# Altium PCB layout.PcbDoc (part 10 of 11)
Units mil, origin at the board's own origin, x right, y up, seen from the top; angles counter-clockwise.
Board outline 3543.31 x 3149.61 mil, 2 copper layers (Top Layer, Bottom Layer); 78 components, 73 nets, 327 pads, 143 vias.
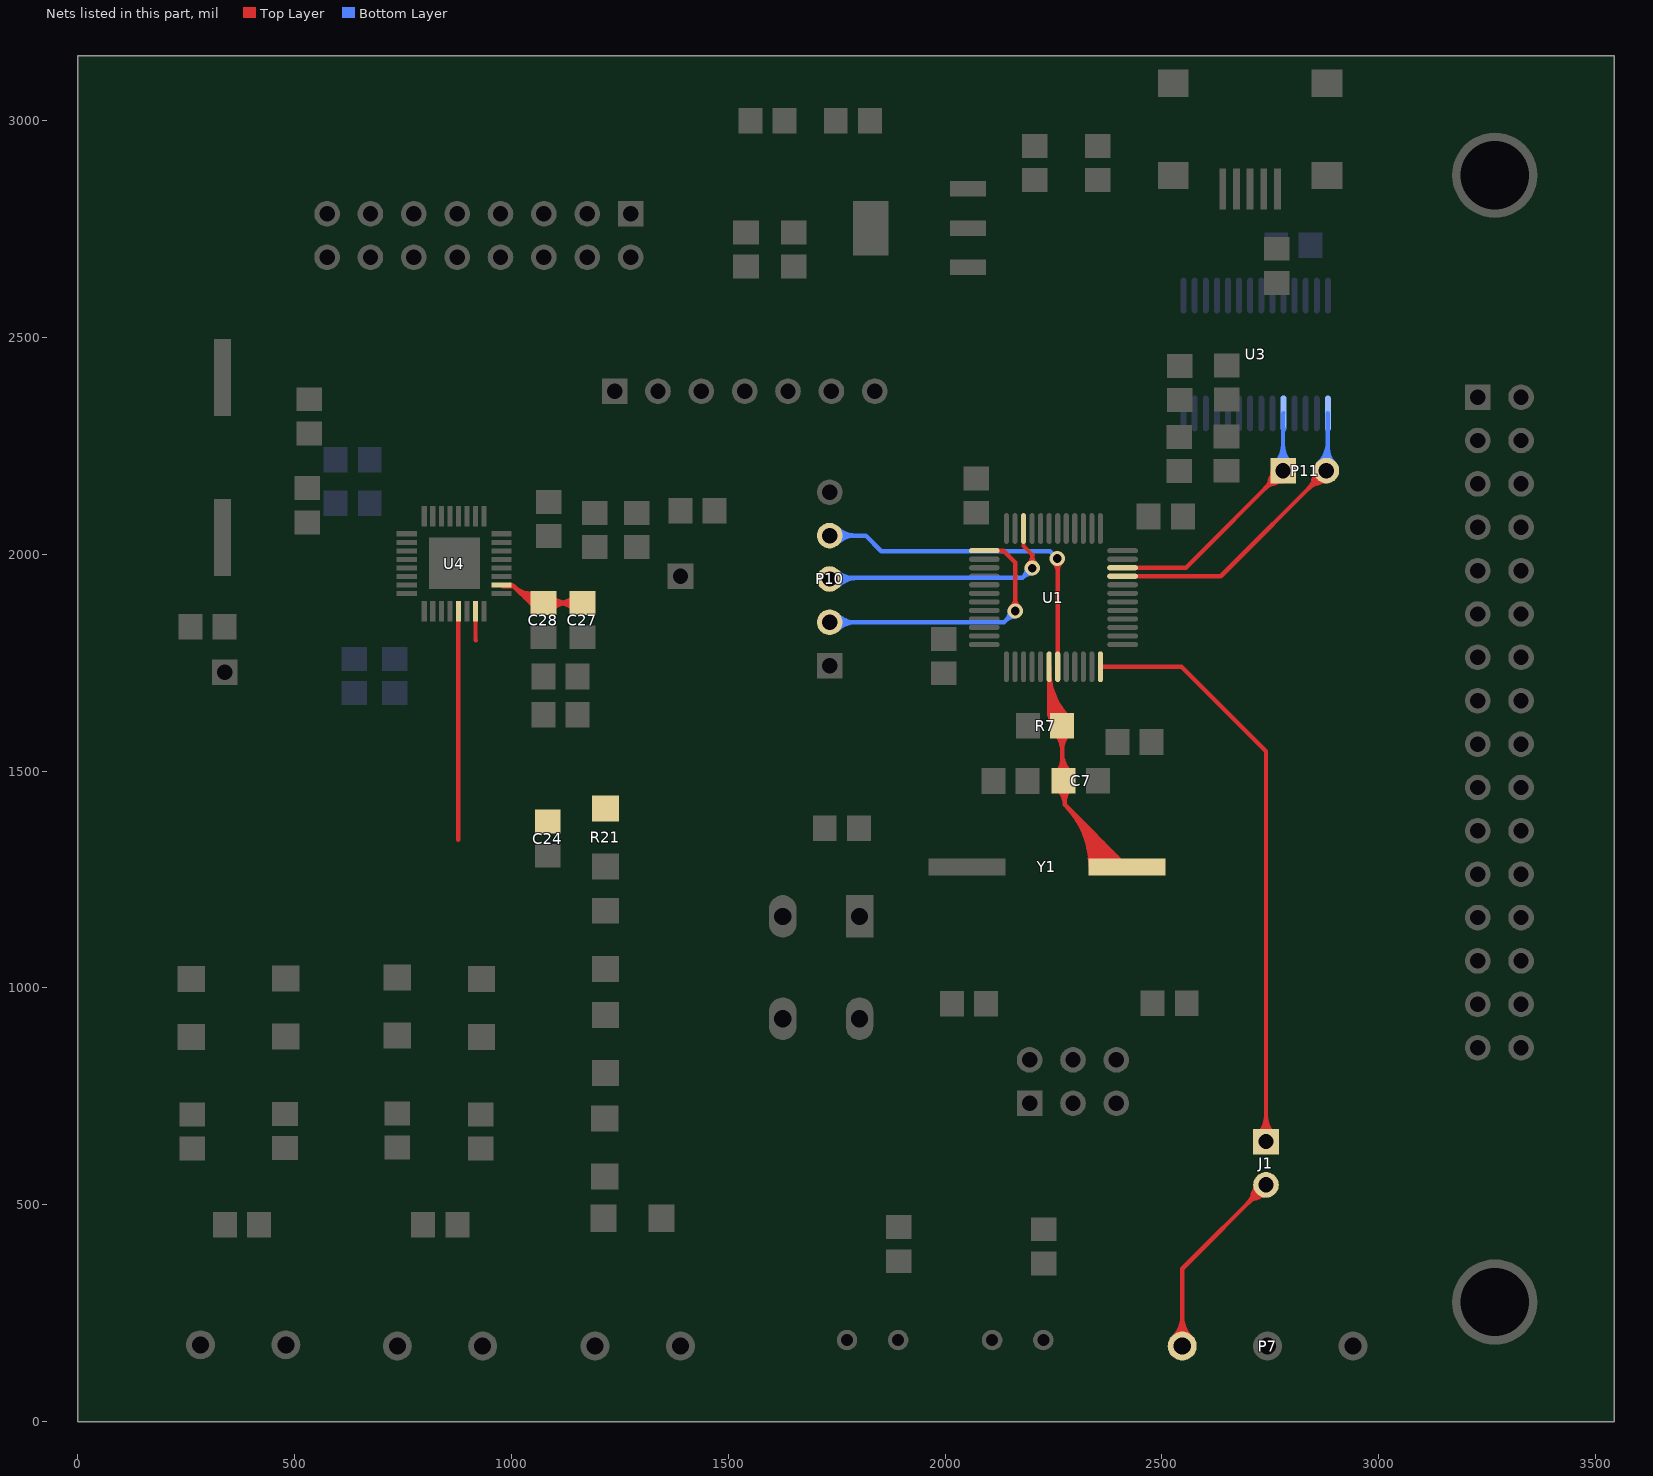
[diagram p10: the nets of this part, all layers, seen from the top]

## Via types
v1: diameter 35, hole 20, Top Layer to Bottom Layer, tented both sides, 113 vias
v2: diameter 35, hole 20, Top Layer to Bottom Layer, 28 vias
v3: diameter 35.43, hole 35.43, Top Layer to Bottom Layer, 2 vias

## Nets (pads, with @x,y where several pads share a name; then routed paths per layer and width w, separated by ;. In a path a pad name is that pad's centre, name@x,y a point inside that pad or via, vN(x,y) a via of type N, cw(c..) or ccw(c..) an arc to the next point about the centre after c; other vN are vias at no path point) (continued)
OSC_OUT: C7.1 R7.1 U1.6 Y1.1 | length 14604.9
  Top Layer w10: U1.6@2240.16,1740.55 2240.16,1634.33 ; Y1.1@2419.65,1279 2276,1422.65 2276,1475.63 C7.1@2273.63,1478 2270.05,1481.58 R7.1@2270.05,1604.44 2240.16,1634.33 ; 2240.16,1634.33 cw(c2220.72,1614.89) R7.1@2247.81,1610.23 ; 2240.16,1634.33 ccw(c2257.34,1651.51) R7.1@2263.93,1628.12 ; 2240.16,1634.33 cw(c2220.72,1614.89) R7.1@2247.81,1610.23 ; 2240.16,1634.33 ccw(c2257.34,1651.51) R7.1@2263.93,1628.12 ; 2240.16,1634.33 cw(c2220.72,1614.89) R7.1@2247.81,1610.23 ; 2240.16,1634.33 ccw(c2257.34,1651.51) R7.1@2263.93,1628.12 ; 2240.16,1634.33 cw(c2220.72,1614.89) R7.1@2247.81,1610.23 ; 2240.16,1634.33 ccw(c2257.34,1651.51) R7.1@2263.93,1628.12 ; 2240.16,1634.33 cw(c2220.72,1614.89) R7.1@2247.81,1610.23 ; 2240.16,1634.33 ccw(c2257.34,1651.51) R7.1@2263.93,1628.12 ; 2240.16,1636.46 ccw(c2300.1,1636.46) R7.1@2257.72,1594.08 ; 2240.16,1636.46 ccw(c2300.1,1636.46) R7.1@2257.72,1594.08 ; 2240.16,1636.46 ccw(c2300.1,1636.46) R7.1@2257.72,1594.08 ; 2240.16,1636.46 ccw(c2300.1,1636.46) R7.1@2257.72,1594.08 ; 2240.16,1636.46 ccw(c2300.1,1636.46) R7.1@2257.72,1594.08 ; 2240.16,1660.61 ccw(c2324.24,1660.61) R7.1@2264.79,1601.15 ; 2240.16,1660.61 ccw(c2324.24,1660.61) R7.1@2264.79,1601.15 ; 2240.16,1660.61 ccw(c2324.24,1660.61) R7.1@2264.79,1601.15 ; 2240.16,1660.61 ccw(c2324.24,1660.61) R7.1@2264.79,1601.15 ; 2240.16,1660.61 ccw(c2324.24,1660.61) R7.1@2264.79,1601.15 ; 2240.16,1684.75 ccw(c2348.39,1684.75) R7.1@2271.86,1608.22 ; 2240.16,1684.75 ccw(c2348.39,1684.75) R7.1@2271.86,1608.22 ; 2240.16,1684.75 ccw(c2348.39,1684.75) R7.1@2271.86,1608.22 ; 2240.16,1684.75 ccw(c2348.39,1684.75) R7.1@2271.86,1608.22 ; 2240.16,1684.75 ccw(c2348.39,1684.75) R7.1@2271.86,1608.22 ; U1.6@2240.16,1708.89 ccw(c2372.53,1708.89) R7.1@2278.93,1615.29 ; U1.6@2240.16,1708.89 ccw(c2372.53,1708.89) R7.1@2278.93,1615.29 ; U1.6@2240.16,1708.89 ccw(c2372.53,1708.89) R7.1@2278.93,1615.29 ; U1.6@2240.16,1708.89 ccw(c2372.53,1708.89) R7.1@2278.93,1615.29 ; U1.6@2240.16,1708.89 ccw(c2372.53,1708.89) R7.1@2278.93,1615.29 ; U1.6@2240.16,1733.03 ccw(c2396.67,1733.03) R7.1@2286,1622.36 ; U1.6@2240.16,1733.03 ccw(c2396.67,1733.03) R7.1@2286,1622.36 ; U1.6@2240.16,1733.03 ccw(c2396.67,1733.03) R7.1@2286,1622.36 ; U1.6@2240.16,1733.03 ccw(c2396.67,1733.03) R7.1@2286,1622.36 ; U1.6@2240.16,1733.03 ccw(c2396.67,1733.03) R7.1@2286,1622.36 ; 2240.95,1642.43 ccw(c2264.76,1656.18) R7.1@2267.66,1628.84 ; 2240.95,1642.43 ccw(c2264.76,1656.18) R7.1@2267.66,1628.84 ; 2240.95,1642.43 ccw(c2264.76,1656.18) R7.1@2267.66,1628.84 ; 2240.95,1642.43 ccw(c2264.76,1656.18) R7.1@2267.66,1628.84 ; 2240.95,1642.43 ccw(c2264.76,1656.18) R7.1@2267.66,1628.84 ; 2240.95,1642.43 ccw(c2264.76,1656.18) R7.1@2267.66,1628.84 ; 2240.95,1642.43 ccw(c2264.76,1656.18) R7.1@2267.66,1628.84 ; 2240.95,1642.43 ccw(c2264.76,1656.18) R7.1@2267.66,1628.84 ; 2240.95,1642.43 ccw(c2264.76,1656.18) R7.1@2267.66,1628.84 ; 2240.95,1642.43 ccw(c2264.76,1656.18) R7.1@2267.66,1628.84 ; 2244.56,1655.5 cw(c2200.44,1630.02) R7.1@2248.69,1613.66 ; 2244.56,1655.5 cw(c2200.44,1630.02) R7.1@2248.69,1613.66 ; 2244.56,1655.5 cw(c2200.44,1630.02) R7.1@2248.69,1613.66 ; 2244.56,1655.5 cw(c2200.44,1630.02) R7.1@2248.69,1613.66 ; 2244.56,1655.5 cw(c2200.44,1630.02) R7.1@2248.69,1613.66 ; 2244.56,1655.5 cw(c2200.44,1630.02) R7.1@2248.69,1613.66 ; 2244.56,1655.5 cw(c2200.44,1630.02) R7.1@2248.69,1613.66 ; 2244.56,1655.5 cw(c2200.44,1630.02) R7.1@2248.69,1613.66 ; 2244.56,1655.5 cw(c2200.44,1630.02) R7.1@2248.69,1613.66 ; 2244.56,1655.5 cw(c2200.44,1630.02) R7.1@2248.69,1613.66 ; 2245.27,1634.95 cw(c2219.35,1619.99) R7.1@2248.26,1612.25 ; 2245.27,1634.95 cw(c2219.35,1619.99) R7.1@2248.26,1612.25 ; 2245.27,1634.95 cw(c2219.35,1619.99) R7.1@2248.26,1612.25 ; 2245.27,1634.95 cw(c2219.35,1619.99) R7.1@2248.26,1612.25 ; 2245.27,1634.95 cw(c2219.35,1619.99) R7.1@2248.26,1612.25 ; 2245.27,1634.95 cw(c2219.35,1619.99) R7.1@2248.26,1612.25 ; 2245.27,1634.95 cw(c2219.35,1619.99) R7.1@2248.26,1612.25 ; 2245.27,1634.95 cw(c2219.35,1619.99) R7.1@2248.26,1612.25 ; 2245.27,1634.95 cw(c2219.35,1619.99) R7.1@2248.26,1612.25 ; 2245.27,1634.95 cw(c2219.35,1619.99) R7.1@2248.26,1612.25 ; 2247.94,1649.64 ccw(c2287.8,1672.65) R7.1@2275.89,1628.2 ; 2247.94,1649.64 ccw(c2287.8,1672.65) R7.1@2275.89,1628.2 ; 2247.94,1649.64 ccw(c2287.8,1672.65) R7.1@2275.89,1628.2 ; 2247.94,1649.64 ccw(c2287.8,1672.65) R7.1@2275.89,1628.2 ; 2247.94,1649.64 ccw(c2287.8,1672.65) R7.1@2275.89,1628.2 ; 2247.94,1649.64 ccw(c2287.8,1672.65) R7.1@2275.89,1628.2 ; 2247.94,1649.64 ccw(c2287.8,1672.65) R7.1@2275.89,1628.2 ; 2247.94,1649.64 ccw(c2287.8,1672.65) R7.1@2275.89,1628.2 ; 2247.94,1649.64 ccw(c2287.8,1672.65) R7.1@2275.89,1628.2 ; 2247.94,1649.64 ccw(c2287.8,1672.65) R7.1@2275.89,1628.2 ; R7.1@2248.64,1629.12 ccw(c2266.54,1639.45) R7.1@2268.72,1618.9 ; R7.1@2248.64,1629.12 ccw(c2266.54,1639.45) R7.1@2268.72,1618.9 ; R7.1@2248.64,1629.12 ccw(c2266.54,1639.45) R7.1@2268.72,1618.9 ; R7.1@2248.64,1629.12 ccw(c2266.54,1639.45) R7.1@2268.72,1618.9 ; R7.1@2248.64,1629.12 ccw(c2266.54,1639.45) R7.1@2268.72,1618.9 ; R7.1@2248.64,1629.12 ccw(c2266.54,1639.45) R7.1@2268.72,1618.9 ; R7.1@2248.64,1629.12 ccw(c2266.54,1639.45) R7.1@2268.72,1618.9 ; R7.1@2248.64,1629.12 ccw(c2266.54,1639.45) R7.1@2268.72,1618.9 ; R7.1@2248.64,1629.12 ccw(c2266.54,1639.45) R7.1@2268.72,1618.9 ; R7.1@2248.64,1629.12 ccw(c2266.54,1639.45) R7.1@2268.72,1618.9 ; 2250.56,1642.4 ccw(c2306.88,1638.72) R7.1@2264.45,1601.5 ; 2250.56,1642.4 ccw(c2306.88,1638.72) R7.1@2264.45,1601.5 ; 2250.56,1642.4 ccw(c2306.88,1638.72) R7.1@2264.45,1601.5 ; 2250.56,1642.4 ccw(c2306.88,1638.72) R7.1@2264.45,1601.5 ; 2250.56,1642.4 ccw(c2306.88,1638.72) R7.1@2264.45,1601.5 ; 2250.56,1642.4 ccw(c2306.88,1638.72) R7.1@2264.45,1601.5 ; 2250.56,1642.4 ccw(c2306.88,1638.72) R7.1@2264.45,1601.5 ; 2250.56,1642.4 ccw(c2306.88,1638.72) R7.1@2264.45,1601.5 ; 2250.56,1642.4 ccw(c2306.88,1638.72) R7.1@2264.45,1601.5 ; 2250.56,1642.4 ccw(c2306.88,1638.72) R7.1@2264.45,1601.5 ; R7.1@2251.58,1619.36 ccw(c2224.65,1638.23) 2252.18,1656.22 ; R7.1@2251.58,1619.36 ccw(c2224.65,1638.23) 2252.18,1656.22 ; R7.1@2251.58,1619.36 ccw(c2224.65,1638.23) 2252.18,1656.22 ; R7.1@2251.58,1619.36 ccw(c2224.65,1638.23) 2252.18,1656.22 ; R7.1@2251.58,1619.36 ccw(c2224.65,1638.23) 2252.18,1656.22 ; R7.1@2251.58,1619.36 ccw(c2224.65,1638.23) 2252.18,1656.22 ; R7.1@2251.58,1619.36 ccw(c2224.65,1638.23) 2252.18,1656.22 ; R7.1@2251.58,1619.36 ccw(c2224.65,1638.23) 2252.18,1656.22 ; R7.1@2251.58,1619.36 ccw(c2224.65,1638.23) 2252.18,1656.22 ; R7.1@2251.58,1619.36 ccw(c2224.65,1638.23) 2252.18,1656.22 ; R7.1@2254.1,1586.52 cw(c2215.59,1548.01) 2270.05,1548.01 ; R7.1@2254.1,1586.52 cw(c2215.59,1548.01) 2270.05,1548.01 ; R7.1@2254.1,1586.52 cw(c2215.59,1548.01) 2270.05,1548.01 ; R7.1@2254.1,1586.52 cw(c2215.59,1548.01) 2270.05,1548.01 ; R7.1@2254.1,1586.52 cw(c2215.59,1548.01) 2270.05,1548.01 ; 2255.6,1636.38 cw(c2228.25,1620.59) R7.1@2258.15,1610.44 ; 2255.6,1636.38 cw(c2228.25,1620.59) R7.1@2258.15,1610.44 ; 2255.6,1636.38 cw(c2228.25,1620.59) R7.1@2258.15,1610.44 ; 2255.6,1636.38 cw(c2228.25,1620.59) R7.1@2258.15,1610.44 ; 2255.6,1636.38 cw(c2228.25,1620.59) R7.1@2258.15,1610.44 ; 2255.6,1636.38 cw(c2228.25,1620.59) R7.1@2258.15,1610.44 ; 2255.6,1636.38 cw(c2228.25,1620.59) R7.1@2258.15,1610.44 ; 2255.6,1636.38 cw(c2228.25,1620.59) R7.1@2258.15,1610.44 ; 2255.6,1636.38 cw(c2228.25,1620.59) R7.1@2258.15,1610.44 ; 2255.6,1636.38 cw(c2228.25,1620.59) R7.1@2258.15,1610.44 ; C7.1@2257.68,1495.92 ccw(c2227.81,1525.78) 2270.05,1525.78 ; C7.1@2257.68,1495.92 ccw(c2227.81,1525.78) 2270.05,1525.78 ; C7.1@2257.68,1495.92 ccw(c2227.81,1525.78) 2270.05,1525.78 ; C7.1@2257.68,1495.92 ccw(c2227.81,1525.78) 2270.05,1525.78 ; C7.1@2257.68,1495.92 ccw(c2227.81,1525.78) 2270.05,1525.78 ; C7.1@2259.14,1458.75 cw(c2228.83,1422.6) 2276,1422.6 ; C7.1@2259.14,1458.75 cw(c2228.83,1422.6) 2276,1422.6 ; C7.1@2259.14,1458.75 cw(c2228.83,1422.6) 2276,1422.6 ; C7.1@2259.14,1458.75 cw(c2228.83,1422.6) 2276,1422.6 ; C7.1@2259.14,1458.75 cw(c2228.83,1422.6) 2276,1422.6 ; R7.1@2259.76,1613.62 ccw(c2237.68,1629.1) 2260.26,1643.86 ; R7.1@2259.76,1613.62 ccw(c2237.68,1629.1) 2260.26,1643.86 ; R7.1@2259.76,1613.62 ccw(c2237.68,1629.1) 2260.26,1643.86 ; R7.1@2259.76,1613.62 ccw(c2237.68,1629.1) 2260.26,1643.86 ; R7.1@2259.76,1613.62 ccw(c2237.68,1629.1) 2260.26,1643.86 ; R7.1@2259.76,1613.62 ccw(c2237.68,1629.1) 2260.26,1643.86 ; R7.1@2259.76,1613.62 ccw(c2237.68,1629.1) 2260.26,1643.86 ; R7.1@2259.76,1613.62 ccw(c2237.68,1629.1) 2260.26,1643.86 ; R7.1@2259.76,1613.62 ccw(c2237.68,1629.1) 2260.26,1643.86 ; R7.1@2259.76,1613.62 ccw(c2237.68,1629.1) 2260.26,1643.86 ; R7.1@2261.17,1593.59 cw(c2239.73,1572.15) 2270.05,1572.15 ; R7.1@2261.17,1593.59 cw(c2239.73,1572.15) 2270.05,1572.15 ; R7.1@2261.17,1593.59 cw(c2239.73,1572.15) 2270.05,1572.15 ; R7.1@2261.17,1593.59 cw(c2239.73,1572.15) 2270.05,1572.15 ; R7.1@2261.17,1593.59 cw(c2239.73,1572.15) 2270.05,1572.15 ; C7.1@2265.56,1466.41 cw(c2246.8,1444.03) 2276,1444.03 ; C7.1@2265.56,1466.41 cw(c2246.8,1444.03) 2276,1444.03 ; C7.1@2265.56,1466.41 cw(c2246.8,1444.03) 2276,1444.03 ; C7.1@2265.56,1466.41 cw(c2246.8,1444.03) 2276,1444.03 ; C7.1@2265.56,1466.41 cw(c2246.8,1444.03) 2276,1444.03 ; R7.1@2266.78,1633.88 ccw(c2277.24,1640.72) R7.1@2274.67,1628.49 ; R7.1@2266.78,1633.88 ccw(c2277.24,1640.72) R7.1@2274.67,1628.49 ; R7.1@2266.78,1633.88 ccw(c2277.24,1640.72) R7.1@2274.67,1628.49 ; R7.1@2266.78,1633.88 ccw(c2277.24,1640.72) R7.1@2274.67,1628.49 ; R7.1@2266.78,1633.88 ccw(c2277.24,1640.72) R7.1@2274.67,1628.49 ; R7.1@2266.78,1633.88 ccw(c2277.24,1640.72) R7.1@2274.67,1628.49 ; R7.1@2266.78,1633.88 ccw(c2277.24,1640.72) R7.1@2274.67,1628.49 ; R7.1@2266.78,1633.88 ccw(c2277.24,1640.72) R7.1@2274.67,1628.49 ; R7.1@2266.78,1633.88 ccw(c2277.24,1640.72) R7.1@2274.67,1628.49 ; R7.1@2266.78,1633.88 ccw(c2277.24,1640.72) R7.1@2274.67,1628.49 ; 2270.05,1518.94 ccw(c2312.6,1518.94) C7.1@2282.51,1488.85 ; 2270.05,1518.94 ccw(c2312.6,1518.94) C7.1@2282.51,1488.85 ; 2270.05,1518.94 ccw(c2312.6,1518.94) C7.1@2282.51,1488.85 ; 2270.05,1518.94 ccw(c2312.6,1518.94) C7.1@2282.51,1488.85 ; 2270.05,1518.94 ccw(c2312.6,1518.94) C7.1@2282.51,1488.85 ; 2270.05,1543.08 ccw(c2336.74,1543.08) C7.1@2289.58,1495.92 ; 2270.05,1543.08 ccw(c2336.74,1543.08) C7.1@2289.58,1495.92 ; 2270.05,1543.08 ccw(c2336.74,1543.08) C7.1@2289.58,1495.92 ; 2270.05,1543.08 ccw(c2336.74,1543.08) C7.1@2289.58,1495.92 ; 2270.05,1543.08 ccw(c2336.74,1543.08) C7.1@2289.58,1495.92 ; 2270.05,1548.01 cw(c2324.51,1548.01) R7.1@2286,1586.52 ; 2270.05,1548.01 cw(c2324.51,1548.01) R7.1@2286,1586.52 ; 2270.05,1548.01 cw(c2324.51,1548.01) R7.1@2286,1586.52 ; 2270.05,1548.01 cw(c2324.51,1548.01) R7.1@2286,1586.52 ; 2270.05,1548.01 cw(c2324.51,1548.01) R7.1@2286,1586.52 ; 2270.05,1572.15 cw(c2300.37,1572.15) R7.1@2278.93,1593.59 ; 2270.05,1572.15 cw(c2300.37,1572.15) R7.1@2278.93,1593.59 ; 2270.05,1572.15 cw(c2300.37,1572.15) R7.1@2278.93,1593.59 ; 2270.05,1572.15 cw(c2300.37,1572.15) R7.1@2278.93,1593.59 ; 2270.05,1572.15 cw(c2300.37,1572.15) R7.1@2278.93,1593.59 ; 2276,1427.29 cw(c2322.37,1427.29) C7.1@2289.58,1460.08 ; 2276,1427.29 cw(c2322.37,1427.29) C7.1@2289.58,1460.08 ; 2276,1427.29 cw(c2322.37,1427.29) C7.1@2289.58,1460.08 ; 2276,1427.29 cw(c2322.37,1427.29) C7.1@2289.58,1460.08 ; 2276,1427.29 cw(c2322.37,1427.29) C7.1@2289.58,1460.08 ; 2276.96,1421.69 cw(c2134.28,1279) Y1.1@2336.06,1279 ; 2276.96,1421.69 cw(c2134.28,1279) Y1.1@2336.06,1279 ; 2276.96,1421.69 cw(c2134.28,1279) Y1.1@2336.06,1279 ; 2276.96,1421.69 cw(c2134.28,1279) Y1.1@2336.06,1279 ; 2276.96,1421.69 cw(c2134.28,1279) Y1.1@2336.06,1279 ; 2294.03,1404.61 cw(c2168.42,1279) Y1.1@2346.06,1279 ; 2294.03,1404.61 cw(c2168.42,1279) Y1.1@2346.06,1279 ; 2294.03,1404.61 cw(c2168.42,1279) Y1.1@2346.06,1279 ; 2294.03,1404.61 cw(c2168.42,1279) Y1.1@2346.06,1279 ; 2294.03,1404.61 cw(c2168.42,1279) Y1.1@2346.06,1279 ; 2311.1,1387.54 cw(c2202.56,1279) Y1.1@2356.06,1279 ; 2311.1,1387.54 cw(c2202.56,1279) Y1.1@2356.06,1279 ; 2311.1,1387.54 cw(c2202.56,1279) Y1.1@2356.06,1279 ; 2311.1,1387.54 cw(c2202.56,1279) Y1.1@2356.06,1279 ; 2311.1,1387.54 cw(c2202.56,1279) Y1.1@2356.06,1279 ; 2328.17,1370.47 cw(c2236.7,1279) Y1.1@2366.06,1279 ; 2328.17,1370.47 cw(c2236.7,1279) Y1.1@2366.06,1279 ; 2328.17,1370.47 cw(c2236.7,1279) Y1.1@2366.06,1279 ; 2328.17,1370.47 cw(c2236.7,1279) Y1.1@2366.06,1279 ; 2328.17,1370.47 cw(c2236.7,1279) Y1.1@2366.06,1279 ; 2330.56,1323.35 ccw(c2391.16,1330.87) Y1.1@2353.63,1282.7 ; 2330.56,1323.35 ccw(c2391.16,1330.87) Y1.1@2353.63,1282.7 ; 2330.56,1323.35 ccw(c2391.16,1330.87) Y1.1@2353.63,1282.7 ; 2330.56,1323.35 ccw(c2391.16,1330.87) Y1.1@2353.63,1282.7 ; 2330.56,1323.35 ccw(c2391.16,1330.87) Y1.1@2353.63,1282.7 ; 2330.56,1323.35 ccw(c2391.16,1330.87) Y1.1@2353.63,1282.7 ; 2330.56,1323.35 ccw(c2391.16,1330.87) Y1.1@2353.63,1282.7 ; 2330.56,1323.35 ccw(c2391.16,1330.87) Y1.1@2353.63,1282.7 ; 2330.56,1323.35 ccw(c2391.16,1330.87) Y1.1@2353.63,1282.7 ; 2330.56,1323.35 ccw(c2391.16,1330.87) Y1.1@2353.63,1282.7 ; 2333.53,1299.39 ccw(c2370.18,1303.93) Y1.1@2347.48,1274.81 ; 2333.53,1299.39 ccw(c2370.18,1303.93) Y1.1@2347.48,1274.81 ; 2333.53,1299.39 ccw(c2370.18,1303.93) Y1.1@2347.48,1274.81 ; 2333.53,1299.39 ccw(c2370.18,1303.93) Y1.1@2347.48,1274.81 ; 2333.53,1299.39 ccw(c2370.18,1303.93) Y1.1@2347.48,1274.81 ; 2333.53,1299.39 ccw(c2370.18,1303.93) Y1.1@2347.48,1274.81 ; 2333.53,1299.39 ccw(c2370.18,1303.93) Y1.1@2347.48,1274.81 ; 2333.53,1299.39 ccw(c2370.18,1303.93) Y1.1@2347.48,1274.81 ; 2333.53,1299.39 ccw(c2370.18,1303.93) Y1.1@2347.48,1274.81 ; 2333.53,1299.39 ccw(c2370.18,1303.93) Y1.1@2347.48,1274.81 ; 2335.35,1306.89 cw(c2318.75,1294.35) Y1.1@2337.51,1285.35 ; 2335.35,1306.89 cw(c2318.75,1294.35) Y1.1@2337.51,1285.35 ; 2335.35,1306.89 cw(c2318.75,1294.35) Y1.1@2337.51,1285.35 ; 2335.35,1306.89 cw(c2318.75,1294.35) Y1.1@2337.51,1285.35 ; 2335.35,1306.89 cw(c2318.75,1294.35) Y1.1@2337.51,1285.35 ; 2335.35,1306.89 cw(c2318.75,1294.35) Y1.1@2337.51,1285.35 ; 2335.35,1306.89 cw(c2318.75,1294.35) Y1.1@2337.51,1285.35 ; 2335.35,1306.89 cw(c2318.75,1294.35) Y1.1@2337.51,1285.35 ; 2335.35,1306.89 cw(c2318.75,1294.35) Y1.1@2337.51,1285.35 ; 2335.35,1306.89 cw(c2318.75,1294.35) Y1.1@2337.51,1285.35 ; Y1.1@2339.01,1287.83 ccw(c2323.34,1299.62) 2342.76,1302.37 ; Y1.1@2339.01,1287.83 ccw(c2323.34,1299.62) 2342.76,1302.37 ; Y1.1@2339.01,1287.83 ccw(c2323.34,1299.62) 2342.76,1302.37 ; Y1.1@2339.01,1287.83 ccw(c2323.34,1299.62) 2342.76,1302.37 ; Y1.1@2339.01,1287.83 ccw(c2323.34,1299.62) 2342.76,1302.37 ; Y1.1@2339.01,1287.83 ccw(c2323.34,1299.62) 2342.76,1302.37 ; Y1.1@2339.01,1287.83 ccw(c2323.34,1299.62) 2342.76,1302.37 ; Y1.1@2339.01,1287.83 ccw(c2323.34,1299.62) 2342.76,1302.37 ; Y1.1@2339.01,1287.83 ccw(c2323.34,1299.62) 2342.76,1302.37 ; Y1.1@2339.01,1287.83 ccw(c2323.34,1299.62) 2342.76,1302.37 ; 2339.57,1301.3 ccw(c2355.53,1313.36) Y1.1@2352.77,1293.55 ; 2339.57,1301.3 ccw(c2355.53,1313.36) Y1.1@2352.77,1293.55 ; 2339.57,1301.3 ccw(c2355.53,1313.36) Y1.1@2352.77,1293.55 ; 2339.57,1301.3 ccw(c2355.53,1313.36) Y1.1@2352.77,1293.55 ; 2339.57,1301.3 ccw(c2355.53,1313.36) Y1.1@2352.77,1293.55 ; 2339.57,1301.3 ccw(c2355.53,1313.36) Y1.1@2352.77,1293.55 ; 2339.57,1301.3 ccw(c2355.53,1313.36) Y1.1@2352.77,1293.55 ; 2339.57,1301.3 ccw(c2355.53,1313.36) Y1.1@2352.77,1293.55 ; 2339.57,1301.3 ccw(c2355.53,1313.36) Y1.1@2352.77,1293.55 ; 2339.57,1301.3 ccw(c2355.53,1313.36) Y1.1@2352.77,1293.55 ; 2339.63,1324.54 ccw(c2390.41,1331.72) Y1.1@2359.58,1290.74 ; 2339.63,1324.54 ccw(c2390.41,1331.72) Y1.1@2359.58,1290.74 ; 2339.63,1324.54 ccw(c2390.41,1331.72) Y1.1@2359.58,1290.74 ; 2339.63,1324.54 ccw(c2390.41,1331.72) Y1.1@2359.58,1290.74 ; 2339.63,1324.54 ccw(c2390.41,1331.72) Y1.1@2359.58,1290.74 ; 2339.63,1324.54 ccw(c2390.41,1331.72) Y1.1@2359.58,1290.74 ; 2339.63,1324.54 ccw(c2390.41,1331.72) Y1.1@2359.58,1290.74 ; 2339.63,1324.54 ccw(c2390.41,1331.72) Y1.1@2359.58,1290.74 ; 2339.63,1324.54 ccw(c2390.41,1331.72) Y1.1@2359.58,1290.74 ; 2339.63,1324.54 ccw(c2390.41,1331.72) Y1.1@2359.58,1290.74 ; Y1.1@2341.8,1290.64 ccw(c2327.7,1308.98) 2350.53,1312.73 ; Y1.1@2341.8,1290.64 ccw(c2327.7,1308.98) 2350.53,1312.73 ; Y1.1@2341.8,1290.64 ccw(c2327.7,1308.98) 2350.53,1312.73 ; Y1.1@2341.8,1290.64 ccw(c2327.7,1308.98) 2350.53,1312.73 ; Y1.1@2341.8,1290.64 ccw(c2327.7,1308.98) 2350.53,1312.73 ; Y1.1@2341.8,1290.64 ccw(c2327.7,1308.98) 2350.53,1312.73 ; Y1.1@2341.8,1290.64 ccw(c2327.7,1308.98) 2350.53,1312.73 ; Y1.1@2341.8,1290.64 ccw(c2327.7,1308.98) 2350.53,1312.73 ; Y1.1@2341.8,1290.64 ccw(c2327.7,1308.98) 2350.53,1312.73 ; Y1.1@2341.8,1290.64 ccw(c2327.7,1308.98) 2350.53,1312.73 ; 2343.01,1300.64 ccw(c2369.89,1304.44) Y1.1@2353.56,1282.74 ; 2343.01,1300.64 ccw(c2369.89,1304.44) Y1.1@2353.56,1282.74 ; 2343.01,1300.64 ccw(c2369.89,1304.44) Y1.1@2353.56,1282.74 ; 2343.01,1300.64 ccw(c2369.89,1304.44) Y1.1@2353.56,1282.74 ; 2343.01,1300.64 ccw(c2369.89,1304.44) Y1.1@2353.56,1282.74 ; 2343.01,1300.64 ccw(c2369.89,1304.44) Y1.1@2353.56,1282.74 ; 2343.01,1300.64 ccw(c2369.89,1304.44) Y1.1@2353.56,1282.74 ; 2343.01,1300.64 ccw(c2369.89,1304.44) Y1.1@2353.56,1282.74 ; 2343.01,1300.64 ccw(c2369.89,1304.44) Y1.1@2353.56,1282.74 ; 2343.01,1300.64 ccw(c2369.89,1304.44) Y1.1@2353.56,1282.74 ; 2345.25,1353.4 cw(c2270.85,1279) Y1.1@2376.06,1279 ; 2345.25,1353.4 cw(c2270.85,1279) Y1.1@2376.06,1279 ; 2345.25,1353.4 cw(c2270.85,1279) Y1.1@2376.06,1279 ; 2345.25,1353.4 cw(c2270.85,1279) Y1.1@2376.06,1279 ; 2345.25,1353.4 cw(c2270.85,1279) Y1.1@2376.06,1279 ; 2352.23,1302.34 ccw(c2369.55,1305.18) Y1.1@2359.31,1290.93 ; 2352.23,1302.34 ccw(c2369.55,1305.18) Y1.1@2359.31,1290.93 ; 2352.23,1302.34 ccw(c2369.55,1305.18) Y1.1@2359.31,1290.93 ; 2352.23,1302.34 ccw(c2369.55,1305.18) Y1.1@2359.31,1290.93 ; 2352.23,1302.34 ccw(c2369.55,1305.18) Y1.1@2359.31,1290.93 ; 2352.23,1302.34 ccw(c2369.55,1305.18) Y1.1@2359.31,1290.93 ; 2352.23,1302.34 ccw(c2369.55,1305.18) Y1.1@2359.31,1290.93 ; 2352.23,1302.34 ccw(c2369.55,1305.18) Y1.1@2359.31,1290.93 ; 2352.23,1302.34 ccw(c2369.55,1305.18) Y1.1@2359.31,1290.93 ; 2352.23,1302.34 ccw(c2369.55,1305.18) Y1.1@2359.31,1290.93 ; 2362.32,1336.33 cw(c2304.99,1279) Y1.1@2386.06,1279 ; 2362.32,1336.33 cw(c2304.99,1279) Y1.1@2386.06,1279 ; 2362.32,1336.33 cw(c2304.99,1279) Y1.1@2386.06,1279 ; 2362.32,1336.33 cw(c2304.99,1279) Y1.1@2386.06,1279 ; 2362.32,1336.33 cw(c2304.99,1279) Y1.1@2386.06,1279 ; 2379.39,1319.26 cw(c2339.13,1279) Y1.1@2396.06,1279 ; 2379.39,1319.26 cw(c2339.13,1279) Y1.1@2396.06,1279 ; 2379.39,1319.26 cw(c2339.13,1279) Y1.1@2396.06,1279 ; 2379.39,1319.26 cw(c2339.13,1279) Y1.1@2396.06,1279 ; 2379.39,1319.26 cw(c2339.13,1279) Y1.1@2396.06,1279 ; 2388.59,1306.89 ccw(c2435.98,1319.59) Y1.1@2417.66,1274.07 ; 2388.59,1306.89 ccw(c2435.98,1319.59) Y1.1@2417.66,1274.07 ; 2388.59,1306.89 ccw(c2435.98,1319.59) Y1.1@2417.66,1274.07 ; 2388.59,1306.89 ccw(c2435.98,1319.59) Y1.1@2417.66,1274.07 ; 2388.59,1306.89 ccw(c2435.98,1319.59) Y1.1@2417.66,1274.07 ; 2388.59,1306.89 ccw(c2435.98,1319.59) Y1.1@2417.66,1274.07 ; 2388.59,1306.89 ccw(c2435.98,1319.59) Y1.1@2417.66,1274.07 ; 2388.59,1306.89 ccw(c2435.98,1319.59) Y1.1@2417.66,1274.07 ; 2388.59,1306.89 ccw(c2435.98,1319.59) Y1.1@2417.66,1274.07 ; 2388.59,1306.89 ccw(c2435.98,1319.59) Y1.1@2417.66,1274.07 ; Y1.1@2393.77,1287.54 ccw(c2426.63,1296.35) Y1.1@2413.93,1264.79 ; Y1.1@2393.77,1287.54 ccw(c2426.63,1296.35) Y1.1@2413.93,1264.79 ; Y1.1@2393.77,1287.54 ccw(c2426.63,1296.35) Y1.1@2413.93,1264.79 ; Y1.1@2393.77,1287.54 ccw(c2426.63,1296.35) Y1.1@2413.93,1264.79 ; Y1.1@2393.77,1287.54 ccw(c2426.63,1296.35) Y1.1@2413.93,1264.79 ; Y1.1@2393.77,1287.54 ccw(c2426.63,1296.35) Y1.1@2413.93,1264.79 ; Y1.1@2393.77,1287.54 ccw(c2426.63,1296.35) Y1.1@2413.93,1264.79 ; Y1.1@2393.77,1287.54 ccw(c2426.63,1296.35) Y1.1@2413.93,1264.79 ; Y1.1@2393.77,1287.54 ccw(c2426.63,1296.35) Y1.1@2413.93,1264.79 ; Y1.1@2393.77,1287.54 ccw(c2426.63,1296.35) Y1.1@2413.93,1264.79 ; 2396.46,1302.19 cw(c2373.27,1279) Y1.1@2406.06,1279 ; 2396.46,1302.19 cw(c2373.27,1279) Y1.1@2406.06,1279 ; 2396.46,1302.19 cw(c2373.27,1279) Y1.1@2406.06,1279 ; 2396.46,1302.19 cw(c2373.27,1279) Y1.1@2406.06,1279 ; 2396.46,1302.19 cw(c2373.27,1279) Y1.1@2406.06,1279 ; Y1.1@2413.53,1285.12 cw(c2407.41,1279) Y1.1@2416.06,1279 ; Y1.1@2413.53,1285.12 cw(c2407.41,1279) Y1.1@2416.06,1279 ; Y1.1@2413.53,1285.12 cw(c2407.41,1279) Y1.1@2416.06,1279 ; Y1.1@2413.53,1285.12 cw(c2407.41,1279) Y1.1@2416.06,1279 ; Y1.1@2413.53,1285.12 cw(c2407.41,1279) Y1.1@2416.06,1279
REFIN: C27.1 C28.1 U4.18 | length 3632.3
  Top Layer w10: U4.18@977.23,1929.1 980.01,1926.32 1005.41,1926.32 ; C27.1@1164,1887.37 C28.1@1074,1887.37 1044.36,1887.37 ; U4.18@995.3,1928.27 cw(c998.92,1919.83) 1005.41,1926.32 ; U4.18@995.3,1928.27 cw(c998.92,1919.83) 1005.41,1926.32 ; U4.18@995.3,1928.27 cw(c998.92,1919.83) 1005.41,1926.32 ; U4.18@995.3,1928.27 cw(c998.92,1919.83) 1005.41,1926.32 ; U4.18@995.3,1928.27 cw(c998.92,1919.83) 1005.41,1926.32 ; U4.18@995.58,1929.74 ccw(c1003.84,1938) 1003.84,1926.32 ; U4.18@995.58,1929.74 ccw(c1003.84,1938) 1003.84,1926.32 ; U4.18@995.58,1929.74 ccw(c1003.84,1938) 1003.84,1926.32 ; U4.18@995.58,1929.74 ccw(c1003.84,1938) 1003.84,1926.32 ; U4.18@995.58,1929.74 ccw(c1003.84,1938) 1003.84,1926.32 ; 1005.41,1926.32 ccw(c1051.12,1972.04) C28.1@1066.62,1909.27 ; 1005.41,1926.32 ccw(c1051.12,1972.04) C28.1@1066.62,1909.27 ; 1005.41,1926.32 ccw(c1051.12,1972.04) C28.1@1066.62,1909.27 ; 1005.41,1926.32 ccw(c1051.12,1972.04) C28.1@1066.62,1909.27 ; 1005.41,1926.32 ccw(c1051.12,1972.04) C28.1@1066.62,1909.27 ; 1005.41,1926.32 1044.36,1887.37 ; 1017.94,1913.79 ccw(c1056.09,1951.94) C28.1@1069.02,1899.56 ; 1017.94,1913.79 ccw(c1056.09,1951.94) C28.1@1069.02,1899.56 ; 1017.94,1913.79 ccw(c1056.09,1951.94) C28.1@1069.02,1899.56 ; 1017.94,1913.79 ccw(c1056.09,1951.94) C28.1@1069.02,1899.56 ; 1017.94,1913.79 ccw(c1056.09,1951.94) C28.1@1069.02,1899.56 ; 1030.47,1901.26 ccw(c1061.05,1931.84) C28.1@1071.42,1889.85 ; 1030.47,1901.26 ccw(c1061.05,1931.84) C28.1@1071.42,1889.85 ; 1030.47,1901.26 ccw(c1061.05,1931.84) C28.1@1071.42,1889.85 ; 1030.47,1901.26 ccw(c1061.05,1931.84) C28.1@1071.42,1889.85 ; 1030.47,1901.26 ccw(c1061.05,1931.84) C28.1@1071.42,1889.85 ; 1036.81,1900.2 cw(c1035.87,1852.61) C28.1@1070.19,1885.6 ; 1036.81,1900.2 cw(c1035.87,1852.61) C28.1@1070.19,1885.6 ; 1036.81,1900.2 cw(c1035.87,1852.61) C28.1@1070.19,1885.6 ; 1036.81,1900.2 cw(c1035.87,1852.61) C28.1@1070.19,1885.6 ; 1036.81,1900.2 cw(c1035.87,1852.61) C28.1@1070.19,1885.6 ; 1036.81,1900.2 cw(c1035.87,1852.61) C28.1@1070.19,1885.6 ; 1036.81,1900.2 cw(c1035.87,1852.61) C28.1@1070.19,1885.6 ; 1036.81,1900.2 cw(c1035.87,1852.61) C28.1@1070.19,1885.6 ; 1036.81,1900.2 cw(c1035.87,1852.61) C28.1@1070.19,1885.6 ; 1036.81,1900.2 cw(c1035.87,1852.61) C28.1@1070.19,1885.6 ; 1037.83,1909.84 cw(c1036.71,1853.42) C28.1@1077.4,1892.53 ; 1037.83,1909.84 cw(c1036.71,1853.42) C28.1@1077.4,1892.53 ; 1037.83,1909.84 cw(c1036.71,1853.42) C28.1@1077.4,1892.53 ; 1037.83,1909.84 cw(c1036.71,1853.42) C28.1@1077.4,1892.53 ; 1037.83,1909.84 cw(c1036.71,1853.42) C28.1@1077.4,1892.53 ; 1037.83,1909.84 cw(c1036.71,1853.42) C28.1@1077.4,1892.53 ; 1037.83,1909.84 cw(c1036.71,1853.42) C28.1@1077.4,1892.53 ; 1037.83,1909.84 cw(c1036.71,1853.42) C28.1@1077.4,1892.53 ; 1037.83,1909.84 cw(c1036.71,1853.42) C28.1@1077.4,1892.53 ; 1037.83,1909.84 cw(c1036.71,1853.42) C28.1@1077.4,1892.53 ; 1043,1888.73 ccw(c1066.01,1911.74) C28.1@1073.82,1880.15 ; 1043,1888.73 ccw(c1066.01,1911.74) C28.1@1073.82,1880.15 ; 1043,1888.73 ccw(c1066.01,1911.74) C28.1@1073.82,1880.15 ; 1043,1888.73 ccw(c1066.01,1911.74) C28.1@1073.82,1880.15 ; 1043,1888.73 ccw(c1066.01,1911.74) C28.1@1073.82,1880.15 ; 1044.36,1887.37 cw(c1044.36,1881.68) C28.1@1049.94,1882.83 ; 1044.36,1887.37 ccw(c1044.36,1893.06) C28.1@1049.94,1891.91 ; 1044.36,1887.37 cw(c1044.36,1881.68) C28.1@1049.94,1882.83 ; 1044.36,1887.37 ccw(c1044.36,1893.06) C28.1@1049.94,1891.91 ; 1044.36,1887.37 cw(c1044.36,1881.68) C28.1@1049.94,1882.83 ; 1044.36,1887.37 ccw(c1044.36,1893.06) C28.1@1049.94,1891.91 ; 1044.36,1887.37 cw(c1044.36,1881.68) C28.1@1049.94,1882.83 ; 1044.36,1887.37 ccw(c1044.36,1893.06) C28.1@1049.94,1891.91 ; 1044.36,1887.37 cw(c1044.36,1881.68) C28.1@1049.94,1882.83 ; 1044.36,1887.37 ccw(c1044.36,1893.06) C28.1@1049.94,1891.91 ; C28.1@1047.1,1899.99 ccw(c1047.36,1913.04) C28.1@1056.4,1903.63 ; C28.1@1047.1,1899.99 ccw(c1047.36,1913.04) C28.1@1056.4,1903.63 ; C28.1@1047.1,1899.99 ccw(c1047.36,1913.04) C28.1@1056.4,1903.63 ; C28.1@1047.1,1899.99 ccw(c1047.36,1913.04) C28.1@1056.4,1903.63 ; C28.1@1047.1,1899.99 ccw(c1047.36,1913.04) C28.1@1056.4,1903.63 ; C28.1@1047.1,1899.99 ccw(c1047.36,1913.04) C28.1@1056.4,1903.63 ; C28.1@1047.1,1899.99 ccw(c1047.36,1913.04) C28.1@1056.4,1903.63 ; C28.1@1047.1,1899.99 ccw(c1047.36,1913.04) C28.1@1056.4,1903.63 ; C28.1@1047.1,1899.99 ccw(c1047.36,1913.04) C28.1@1056.4,1903.63 ; C28.1@1047.1,1899.99 ccw(c1047.36,1913.04) C28.1@1056.4,1903.63 ; C28.1@1084.85,1878.49 cw(c1106.29,1857.05) 1106.29,1887.37 ; C28.1@1084.85,1878.49 cw(c1106.29,1857.05) 1106.29,1887.37 ; C28.1@1084.85,1878.49 cw(c1106.29,1857.05) 1106.29,1887.37 ; C28.1@1084.85,1878.49 cw(c1106.29,1857.05) 1106.29,1887.37 ; C28.1@1084.85,1878.49 cw(c1106.29,1857.05) 1106.29,1887.37 ; C28.1@1084.85,1896.25 ccw(c1106.29,1917.69) 1106.29,1887.37 ; C28.1@1084.85,1896.25 ccw(c1106.29,1917.69) 1106.29,1887.37 ; C28.1@1084.85,1896.25 ccw(c1106.29,1917.69) 1106.29,1887.37 ; C28.1@1084.85,1896.25 ccw(c1106.29,1917.69) 1106.29,1887.37 ; C28.1@1084.85,1896.25 ccw(c1106.29,1917.69) 1106.29,1887.37 ; C28.1@1091.92,1871.42 cw(c1130.43,1832.91) 1130.43,1887.37 ; C28.1@1091.92,1871.42 cw(c1130.43,1832.91) 1130.43,1887.37 ; C28.1@1091.92,1871.42 cw(c1130.43,1832.91) 1130.43,1887.37 ; C28.1@1091.92,1871.42 cw(c1130.43,1832.91) 1130.43,1887.37 ; C28.1@1091.92,1871.42 cw(c1130.43,1832.91) 1130.43,1887.37 ; C28.1@1091.92,1903.32 ccw(c1130.43,1941.83) 1130.43,1887.37 ; C28.1@1091.92,1903.32 ccw(c1130.43,1941.83) 1130.43,1887.37 ; C28.1@1091.92,1903.32 ccw(c1130.43,1941.83) 1130.43,1887.37 ; C28.1@1091.92,1903.32 ccw(c1130.43,1941.83) 1130.43,1887.37 ; C28.1@1091.92,1903.32 ccw(c1130.43,1941.83) 1130.43,1887.37 ; 1107.57,1887.37 cw(c1107.57,1832.91) C27.1@1146.08,1871.42 ; 1107.57,1887.37 ccw(c1107.57,1941.83) C27.1@1146.08,1903.32 ; 1107.57,1887.37 cw(c1107.57,1832.91) C27.1@1146.08,1871.42 ; 1107.57,1887.37 ccw(c1107.57,1941.83) C27.1@1146.08,1903.32 ; 1107.57,1887.37 cw(c1107.57,1832.91) C27.1@1146.08,1871.42 ; 1107.57,1887.37 ccw(c1107.57,1941.83) C27.1@1146.08,1903.32 ; 1107.57,1887.37 cw(c1107.57,1832.91) C27.1@1146.08,1871.42 ; 1107.57,1887.37 ccw(c1107.57,1941.83) C27.1@1146.08,1903.32 ; 1107.57,1887.37 cw(c1107.57,1832.91) C27.1@1146.08,1871.42 ; 1107.57,1887.37 ccw(c1107.57,1941.83) C27.1@1146.08,1903.32 ; 1131.71,1887.37 cw(c1131.71,1857.05) C27.1@1153.15,1878.49 ; 1131.71,1887.37 ccw(c1131.71,1917.69) C27.1@1153.15,1896.25 ; 1131.71,1887.37 cw(c1131.71,1857.05) C27.1@1153.15,1878.49 ; 1131.71,1887.37 ccw(c1131.71,1917.69) C27.1@1153.15,1896.25 ; 1131.71,1887.37 cw(c1131.71,1857.05) C27.1@1153.15,1878.49 ; 1131.71,1887.37 ccw(c1131.71,1917.69) C27.1@1153.15,1896.25 ; 1131.71,1887.37 cw(c1131.71,1857.05) C27.1@1153.15,1878.49 ; 1131.71,1887.37 ccw(c1131.71,1917.69) C27.1@1153.15,1896.25 ; 1131.71,1887.37 cw(c1131.71,1857.05) C27.1@1153.15,1878.49 ; 1131.71,1887.37 ccw(c1131.71,1917.69) C27.1@1153.15,1896.25
RELAY: J1.2 P7.1 | length 2933.1
  Top Layer w10: P7.1@2547,174 2547,352.51 J1.2@2740.16,545.67 ; P7.1@2526.87,194.13 ccw(c2478.28,242.72) 2547,242.72 ; P7.1@2526.87,194.13 ccw(c2478.28,242.72) 2547,242.72 ; P7.1@2526.87,194.13 ccw(c2478.28,242.72) 2547,242.72 ; P7.1@2526.87,194.13 ccw(c2478.28,242.72) 2547,242.72 ; P7.1@2526.87,194.13 ccw(c2478.28,242.72) 2547,242.72 ; P7.1@2533.94,187.06 ccw(c2502.42,218.58) 2547,218.58 ; P7.1@2533.94,187.06 ccw(c2502.42,218.58) 2547,218.58 ; P7.1@2533.94,187.06 ccw(c2502.42,218.58) 2547,218.58 ; P7.1@2533.94,187.06 ccw(c2502.42,218.58) 2547,218.58 ; P7.1@2533.94,187.06 ccw(c2502.42,218.58) 2547,218.58 ; 2547,218.58 ccw(c2591.58,218.58) P7.1@2560.06,187.06 ; 2547,218.58 ccw(c2591.58,218.58) P7.1@2560.06,187.06 ; 2547,218.58 ccw(c2591.58,218.58) P7.1@2560.06,187.06 ; 2547,218.58 ccw(c2591.58,218.58) P7.1@2560.06,187.06 ; 2547,218.58 ccw(c2591.58,218.58) P7.1@2560.06,187.06 ; 2547,242.72 ccw(c2615.72,242.72) P7.1@2567.13,194.13 ; 2547,242.72 ccw(c2615.72,242.72) P7.1@2567.13,194.13 ; 2547,242.72 ccw(c2615.72,242.72) P7.1@2567.13,194.13 ; 2547,242.72 ccw(c2615.72,242.72) P7.1@2567.13,194.13 ; 2547,242.72 ccw(c2615.72,242.72) P7.1@2567.13,194.13 ; 2698.29,503.8 cw(c2740.16,461.93) J1.2@2740.16,521.14 ; 2698.29,503.8 ccw(c2656.42,545.67) J1.2@2715.63,545.67 ; 2698.29,503.8 cw(c2740.16,461.93) J1.2@2740.16,521.14 ; 2698.29,503.8 ccw(c2656.42,545.67) J1.2@2715.63,545.67 ; 2698.29,503.8 cw(c2740.16,461.93) J1.2@2740.16,521.14 ; 2698.29,503.8 ccw(c2656.42,545.67) J1.2@2715.63,545.67 ; 2698.29,503.8 cw(c2740.16,461.93) J1.2@2740.16,521.14 ; 2698.29,503.8 ccw(c2656.42,545.67) J1.2@2715.63,545.67 ; 2698.29,503.8 cw(c2740.16,461.93) J1.2@2740.16,521.14 ; 2698.29,503.8 ccw(c2656.42,545.67) J1.2@2715.63,545.67 ; 2709.64,523.32 cw(c2746.77,513.37) J1.2@2739.06,551.03 ; 2709.64,523.32 cw(c2746.77,513.37) J1.2@2739.06,551.03 ; 2709.64,523.32 cw(c2746.77,513.37) J1.2@2739.06,551.03 ; 2709.64,523.32 cw(c2746.77,513.37) J1.2@2739.06,551.03 ; 2709.64,523.32 cw(c2746.77,513.37) J1.2@2739.06,551.03 ; 2709.64,523.32 cw(c2746.77,513.37) J1.2@2739.06,551.03 ; 2709.64,523.32 cw(c2746.77,513.37) J1.2@2739.06,551.03 ; 2709.64,523.32 cw(c2746.77,513.37) J1.2@2739.06,551.03 ; 2709.64,523.32 cw(c2746.77,513.37) J1.2@2739.06,551.03 ; 2709.64,523.32 cw(c2746.77,513.37) J1.2@2739.06,551.03 ; 2715.36,520.87 cw(c2740.16,496.07) J1.2@2740.16,531.14 ; 2715.36,520.87 ccw(c2690.56,545.67) J1.2@2725.63,545.67 ; 2715.36,520.87 cw(c2740.16,496.07) J1.2@2740.16,531.14 ; 2715.36,520.87 ccw(c2690.56,545.67) J1.2@2725.63,545.67 ; 2715.36,520.87 cw(c2740.16,496.07) J1.2@2740.16,531.14 ; 2715.36,520.87 ccw(c2690.56,545.67) J1.2@2725.63,545.67 ; 2715.36,520.87 cw(c2740.16,496.07) J1.2@2740.16,531.14 ; 2715.36,520.87 ccw(c2690.56,545.67) J1.2@2725.63,545.67 ; 2715.36,520.87 cw(c2740.16,496.07) J1.2@2740.16,531.14 ; 2715.36,520.87 ccw(c2690.56,545.67) J1.2@2725.63,545.67 ; 2717.81,515.15 ccw(c2707.86,552.28) J1.2@2745.52,544.57 ; 2717.81,515.15 ccw(c2707.86,552.28) J1.2@2745.52,544.57 ; 2717.81,515.15 ccw(c2707.86,552.28) J1.2@2745.52,544.57 ; 2717.81,515.15 ccw(c2707.86,552.28) J1.2@2745.52,544.57 ; 2717.81,515.15 ccw(c2707.86,552.28) J1.2@2745.52,544.57 ; 2717.81,515.15 ccw(c2707.86,552.28) J1.2@2745.52,544.57 ; 2717.81,515.15 ccw(c2707.86,552.28) J1.2@2745.52,544.57 ; 2717.81,515.15 ccw(c2707.86,552.28) J1.2@2745.52,544.57 ; 2717.81,515.15 ccw(c2707.86,552.28) J1.2@2745.52,544.57 ; 2717.81,515.15 ccw(c2707.86,552.28) J1.2@2745.52,544.57
RELAY_CTRL: J1.1 U1.12 | length 2103.2
  Top Layer w10: U1.12@2358.27,1740.55 2545.45,1740.55 2740.16,1545.84 J1.1@2740.16,645.67 ; J1.1@2722.81,663.01 ccw(c2680.94,704.88) 2740.16,704.88 ; J1.1@2722.81,663.01 ccw(c2680.94,704.88) 2740.16,704.88 ; J1.1@2722.81,663.01 ccw(c2680.94,704.88) 2740.16,704.88 ; J1.1@2722.81,663.01 ccw(c2680.94,704.88) 2740.16,704.88 ; J1.1@2722.81,663.01 ccw(c2680.94,704.88) 2740.16,704.88 ; J1.1@2729.89,655.94 ccw(c2705.09,680.74) 2740.16,680.74 ; J1.1@2729.89,655.94 ccw(c2705.09,680.74) 2740.16,680.74 ; J1.1@2729.89,655.94 ccw(c2705.09,680.74) 2740.16,680.74 ; J1.1@2729.89,655.94 ccw(c2705.09,680.74) 2740.16,680.74 ; J1.1@2729.89,655.94 ccw(c2705.09,680.74) 2740.16,680.74 ; 2740.16,680.74 ccw(c2775.23,680.74) J1.1@2750.43,655.94 ; 2740.16,680.74 ccw(c2775.23,680.74) J1.1@2750.43,655.94 ; 2740.16,680.74 ccw(c2775.23,680.74) J1.1@2750.43,655.94 ; 2740.16,680.74 ccw(c2775.23,680.74) J1.1@2750.43,655.94 ; 2740.16,680.74 ccw(c2775.23,680.74) J1.1@2750.43,655.94 ; 2740.16,704.88 ccw(c2799.37,704.88) J1.1@2757.5,663.01 ; 2740.16,704.88 ccw(c2799.37,704.88) J1.1@2757.5,663.01 ; 2740.16,704.88 ccw(c2799.37,704.88) J1.1@2757.5,663.01 ; 2740.16,704.88 ccw(c2799.37,704.88) J1.1@2757.5,663.01 ; 2740.16,704.88 ccw(c2799.37,704.88) J1.1@2757.5,663.01
RSTB: P10.4 U1.7 | length 1774.3
  Top Layer w10: v2(2259,1990) 2259.84,1989.16 U1.7@2259.84,1740.55 ; v2@2250.16,1981.16 cw(c2226.79,1957.79) 2259.84,1957.79 ; v2@2250.16,1981.16 cw(c2226.79,1957.79) 2259.84,1957.79 ; v2@2250.16,1981.16 cw(c2226.79,1957.79) 2259.84,1957.79 ; v2@2250.16,1981.16 cw(c2226.79,1957.79) 2259.84,1957.79 ; v2@2250.16,1981.16 cw(c2226.79,1957.79) 2259.84,1957.79 ; 2259.84,1961.86 cw(c2287.14,1961.86) v2@2267.84,1981.16 ; 2259.84,1961.86 cw(c2287.14,1961.86) v2@2267.84,1981.16 ; 2259.84,1961.86 cw(c2287.14,1961.86) v2@2267.84,1981.16 ; 2259.84,1961.86 cw(c2287.14,1961.86) v2@2267.84,1981.16 ; 2259.84,1961.86 cw(c2287.14,1961.86) v2@2267.84,1981.16
  Bottom Layer w10: P10.4@1734,2043 1817,2043 1853,2007 2242,2007 v2(2259,1990) ; P10.4@1744.27,2032.73 cw(c1769.07,2007.93) 1769.07,2043 ; P10.4@1744.27,2032.73 cw(c1769.07,2007.93) 1769.07,2043 ; P10.4@1744.27,2032.73 cw(c1769.07,2007.93) 1769.07,2043 ; P10.4@1744.27,2032.73 cw(c1769.07,2007.93) 1769.07,2043 ; P10.4@1744.27,2032.73 cw(c1769.07,2007.93) 1769.07,2043 ; P10.4@1744.27,2053.27 ccw(c1769.07,2078.07) 1769.07,2043 ; P10.4@1744.27,2053.27 ccw(c1769.07,2078.07) 1769.07,2043 ; P10.4@1744.27,2053.27 ccw(c1769.07,2078.07) 1769.07,2043 ; P10.4@1744.27,2053.27 ccw(c1769.07,2078.07) 1769.07,2043 ; P10.4@1744.27,2053.27 ccw(c1769.07,2078.07) 1769.07,2043 ; P10.4@1751.34,2025.66 cw(c1793.21,1983.79) 1793.21,2043 ; P10.4@1751.34,2025.66 cw(c1793.21,1983.79) 1793.21,2043 ; P10.4@1751.34,2025.66 cw(c1793.21,1983.79) 1793.21,2043 ; P10.4@1751.34,2025.66 cw(c1793.21,1983.79) 1793.21,2043 ; P10.4@1751.34,2025.66 cw(c1793.21,1983.79) 1793.21,2043 ; P10.4@1751.34,2060.34 ccw(c1793.21,2102.21) 1793.21,2043 ; P10.4@1751.34,2060.34 ccw(c1793.21,2102.21) 1793.21,2043 ; P10.4@1751.34,2060.34 ccw(c1793.21,2102.21) 1793.21,2043 ; P10.4@1751.34,2060.34 ccw(c1793.21,2102.21) 1793.21,2043 ; P10.4@1751.34,2060.34 ccw(c1793.21,2102.21) 1793.21,2043
SWCLK: P10.2 U1.37 | length 1848.1
  Top Layer w10: U1.37@2090.55,2008.27 2134.73,2008.27 2162,1981 v2(2162,1869) ; v2@2153.16,1877.84 ccw(c2131.82,1899.18) 2162,1899.18 ; v2@2153.16,1877.84 ccw(c2131.82,1899.18) 2162,1899.18 ; v2@2153.16,1877.84 ccw(c2131.82,1899.18) 2162,1899.18 ; v2@2153.16,1877.84 ccw(c2131.82,1899.18) 2162,1899.18 ; v2@2153.16,1877.84 ccw(c2131.82,1899.18) 2162,1899.18 ; 2162,1899.18 ccw(c2192.18,1899.18) v2@2170.84,1877.84 ; 2162,1899.18 ccw(c2192.18,1899.18) v2@2170.84,1877.84 ; 2162,1899.18 ccw(c2192.18,1899.18) v2@2170.84,1877.84 ; 2162,1899.18 ccw(c2192.18,1899.18) v2@2170.84,1877.84 ; 2162,1899.18 ccw(c2192.18,1899.18) v2@2170.84,1877.84
  Bottom Layer w10: P10.2@1734,1843 2136,1843 v2(2162,1869) ; P10.2@1744.27,1832.73 cw(c1769.07,1807.93) 1769.07,1843 ; P10.2@1744.27,1832.73 cw(c1769.07,1807.93) 1769.07,1843 ; P10.2@1744.27,1832.73 cw(c1769.07,1807.93) 1769.07,1843 ; P10.2@1744.27,1832.73 cw(c1769.07,1807.93) 1769.07,1843 ; P10.2@1744.27,1832.73 cw(c1769.07,1807.93) 1769.07,1843 ; P10.2@1744.27,1853.27 ccw(c1769.07,1878.07) 1769.07,1843 ; P10.2@1744.27,1853.27 ccw(c1769.07,1878.07) 1769.07,1843 ; P10.2@1744.27,1853.27 ccw(c1769.07,1878.07) 1769.07,1843 ; P10.2@1744.27,1853.27 ccw(c1769.07,1878.07) 1769.07,1843 ; P10.2@1744.27,1853.27 ccw(c1769.07,1878.07) 1769.07,1843 ; P10.2@1751.34,1825.66 cw(c1793.21,1783.79) 1793.21,1843 ; P10.2@1751.34,1825.66 cw(c1793.21,1783.79) 1793.21,1843 ; P10.2@1751.34,1825.66 cw(c1793.21,1783.79) 1793.21,1843 ; P10.2@1751.34,1825.66 cw(c1793.21,1783.79) 1793.21,1843 ; P10.2@1751.34,1825.66 cw(c1793.21,1783.79) 1793.21,1843 ; P10.2@1751.34,1860.34 ccw(c1793.21,1902.21) 1793.21,1843 ; P10.2@1751.34,1860.34 ccw(c1793.21,1902.21) 1793.21,1843 ; P10.2@1751.34,1860.34 ccw(c1793.21,1902.21) 1793.21,1843 ; P10.2@1751.34,1860.34 ccw(c1793.21,1902.21) 1793.21,1843 ; P10.2@1751.34,1860.34 ccw(c1793.21,1902.21) 1793.21,1843 ; 2140.66,1847.66 cw(c2162,1826.32) v2@2162,1856.5 ; 2140.66,1847.66 ccw(c2119.32,1869) v2@2149.5,1869 ; 2140.66,1847.66 cw(c2162,1826.32) v2@2162,1856.5 ; 2140.66,1847.66 ccw(c2119.32,1869) v2@2149.5,1869 ; 2140.66,1847.66 cw(c2162,1826.32) v2@2162,1856.5 ; 2140.66,1847.66 ccw(c2119.32,1869) v2@2149.5,1869 ; 2140.66,1847.66 cw(c2162,1826.32) v2@2162,1856.5 ; 2140.66,1847.66 ccw(c2119.32,1869) v2@2149.5,1869 ; 2140.66,1847.66 cw(c2162,1826.32) v2@2162,1856.5 ; 2140.66,1847.66 ccw(c2119.32,1869) v2@2149.5,1869
SWDIO: P10.3 U1.34 | length 1674.1
  Top Layer w10: U1.34@2181.1,2059.45 2181.1,2018.9 2202,1998 2201,1997 ; v2(2201,1968) 2201,1997 ; v2@2192.42,1977.09 ccw(c2173.61,1997) 2201,1997 ; v2@2192.42,1977.09 ccw(c2173.61,1997) 2201,1997 ; v2@2192.42,1977.09 ccw(c2173.61,1997) 2201,1997 ; v2@2192.42,1977.09 ccw(c2173.61,1997) 2201,1997 ; v2@2192.42,1977.09 ccw(c2173.61,1997) 2201,1997 ; 2201,1997 ccw(c2228.39,1997) v2@2209.58,1977.09 ; 2201,1997 ccw(c2228.39,1997) v2@2209.58,1977.09 ; 2201,1997 ccw(c2228.39,1997) v2@2209.58,1977.09 ; 2201,1997 ccw(c2228.39,1997) v2@2209.58,1977.09 ; 2201,1997 ccw(c2228.39,1997) v2@2209.58,1977.09
  Bottom Layer w10: P10.3@1734,1943 1736.5,1945.5 2178.5,1945.5 v2(2201,1968) ; P10.3@1744.27,1932.73 cw(c1775.11,1901.89) 1775.11,1945.5 ; P10.3@1744.27,1932.73 cw(c1775.11,1901.89) 1775.11,1945.5 ; P10.3@1744.27,1932.73 cw(c1775.11,1901.89) 1775.11,1945.5 ; P10.3@1744.27,1932.73 cw(c1775.11,1901.89) 1775.11,1945.5 ; P10.3@1744.27,1932.73 cw(c1775.11,1901.89) 1775.11,1945.5 ; P10.3@1751.34,1925.66 cw(c1799.25,1877.75) 1799.25,1945.5 ; P10.3@1751.34,1925.66 cw(c1799.25,1877.75) 1799.25,1945.5 ; P10.3@1751.34,1925.66 cw(c1799.25,1877.75) 1799.25,1945.5 ; P10.3@1751.34,1925.66 cw(c1799.25,1877.75) 1799.25,1945.5 ; P10.3@1751.34,1925.66 cw(c1799.25,1877.75) 1799.25,1945.5 ; P10.3@1751.34,1960.34 ccw(c1787.18,1996.18) 1787.18,1945.5 ; P10.3@1751.34,1960.34 ccw(c1787.18,1996.18) 1787.18,1945.5 ; P10.3@1751.34,1960.34 ccw(c1787.18,1996.18) 1787.18,1945.5 ; P10.3@1751.34,1960.34 ccw(c1787.18,1996.18) 1787.18,1945.5 ; P10.3@1751.34,1960.34 ccw(c1787.18,1996.18) 1787.18,1945.5 ; 2179.66,1946.66 cw(c2201,1925.32) v2@2201,1955.5 ; 2179.66,1946.66 ccw(c2158.32,1968) v2@2188.5,1968 ; 2179.66,1946.66 cw(c2201,1925.32) v2@2201,1955.5 ; 2179.66,1946.66 ccw(c2158.32,1968) v2@2188.5,1968 ; 2179.66,1946.66 cw(c2201,1925.32) v2@2201,1955.5 ; 2179.66,1946.66 ccw(c2158.32,1968) v2@2188.5,1968 ; 2179.66,1946.66 cw(c2201,1925.32) v2@2201,1955.5 ; 2179.66,1946.66 ccw(c2158.32,1968) v2@2188.5,1968 ; 2179.66,1946.66 cw(c2201,1925.32) v2@2201,1955.5 ; 2179.66,1946.66 ccw(c2158.32,1968) v2@2188.5,1968
UART_RX: P11.1 U1.22 U3.5 | length 2958.4
  Top Layer w10: U1.22@2409.45,1968.9 2555.51,1968.9 P11.1@2779.53,2192.91 ; 2737.66,2151.04 cw(c2779.53,2109.17) P11.1@2779.53,2168.39 ; 2737.66,2151.04 ccw(c2695.79,2192.91) P11.1@2755,2192.91 ; 2737.66,2151.04 cw(c2779.53,2109.17) P11.1@2779.53,2168.39 ; 2737.66,2151.04 ccw(c2695.79,2192.91) P11.1@2755,2192.91 ; 2737.66,2151.04 cw(c2779.53,2109.17) P11.1@2779.53,2168.39 ; 2737.66,2151.04 ccw(c2695.79,2192.91) P11.1@2755,2192.91 ; 2737.66,2151.04 cw(c2779.53,2109.17) P11.1@2779.53,2168.39 ; 2737.66,2151.04 ccw(c2695.79,2192.91) P11.1@2755,2192.91 ; 2737.66,2151.04 cw(c2779.53,2109.17) P11.1@2779.53,2168.39 ; 2737.66,2151.04 ccw(c2695.79,2192.91) P11.1@2755,2192.91 ; 2749.01,2170.57 cw(c2786.14,2160.62) P11.1@2778.43,2198.28 ; 2749.01,2170.57 cw(c2786.14,2160.62) P11.1@2778.43,2198.28 ; 2749.01,2170.57 cw(c2786.14,2160.62) P11.1@2778.43,2198.28 ; 2749.01,2170.57 cw(c2786.14,2160.62) P11.1@2778.43,2198.28 ; 2749.01,2170.57 cw(c2786.14,2160.62) P11.1@2778.43,2198.28 ; 2749.01,2170.57 cw(c2786.14,2160.62) P11.1@2778.43,2198.28 ; 2749.01,2170.57 cw(c2786.14,2160.62) P11.1@2778.43,2198.28 ; 2749.01,2170.57 cw(c2786.14,2160.62) P11.1@2778.43,2198.28 ; 2749.01,2170.57 cw(c2786.14,2160.62) P11.1@2778.43,2198.28 ; 2749.01,2170.57 cw(c2786.14,2160.62) P11.1@2778.43,2198.28 ; P11.1@2754.73,2168.11 cw(c2779.53,2143.31) P11.1@2779.53,2178.39 ; P11.1@2754.73,2168.11 ccw(c2729.93,2192.91) P11.1@2765,2192.91 ; P11.1@2754.73,2168.11 cw(c2779.53,2143.31) P11.1@2779.53,2178.39 ; P11.1@2754.73,2168.11 ccw(c2729.93,2192.91) P11.1@2765,2192.91 ; P11.1@2754.73,2168.11 cw(c2779.53,2143.31) P11.1@2779.53,2178.39 ; P11.1@2754.73,2168.11 ccw(c2729.93,2192.91) P11.1@2765,2192.91 ; P11.1@2754.73,2168.11 cw(c2779.53,2143.31) P11.1@2779.53,2178.39 ; P11.1@2754.73,2168.11 ccw(c2729.93,2192.91) P11.1@2765,2192.91 ; P11.1@2754.73,2168.11 cw(c2779.53,2143.31) P11.1@2779.53,2178.39 ; P11.1@2754.73,2168.11 ccw(c2729.93,2192.91) P11.1@2765,2192.91 ; 2757.18,2162.4 ccw(c2747.23,2199.53) P11.1@2784.89,2191.82 ; 2757.18,2162.4 ccw(c2747.23,2199.53) P11.1@2784.89,2191.82 ; 2757.18,2162.4 ccw(c2747.23,2199.53) P11.1@2784.89,2191.82 ; 2757.18,2162.4 ccw(c2747.23,2199.53) P11.1@2784.89,2191.82 ; 2757.18,2162.4 ccw(c2747.23,2199.53) P11.1@2784.89,2191.82 ; 2757.18,2162.4 ccw(c2747.23,2199.53) P11.1@2784.89,2191.82 ; 2757.18,2162.4 ccw(c2747.23,2199.53) P11.1@2784.89,2191.82 ; 2757.18,2162.4 ccw(c2747.23,2199.53) P11.1@2784.89,2191.82 ; 2757.18,2162.4 ccw(c2747.23,2199.53) P11.1@2784.89,2191.82 ; 2757.18,2162.4 ccw(c2747.23,2199.53) P11.1@2784.89,2191.82
  Bottom Layer w10: P11.1@2779.53,2192.91 2779.53,2323.82 U3.5@2780.51,2324.8 ; P11.1@2762.18,2210.26 ccw(c2720.31,2252.13) 2779.53,2252.13 ; P11.1@2762.18,2210.26 ccw(c2720.31,2252.13) 2779.53,2252.13 ; P11.1@2762.18,2210.26 ccw(c2720.31,2252.13) 2779.53,2252.13 ; P11.1@2762.18,2210.26 ccw(c2720.31,2252.13) 2779.53,2252.13 ; P11.1@2762.18,2210.26 ccw(c2720.31,2252.13) 2779.53,2252.13 ; P11.1@2769.26,2203.19 ccw(c2744.46,2227.99) 2779.53,2227.99 ; P11.1@2769.26,2203.19 ccw(c2744.46,2227.99) 2779.53,2227.99 ; P11.1@2769.26,2203.19 ccw(c2744.46,2227.99) 2779.53,2227.99 ; P11.1@2769.26,2203.19 ccw(c2744.46,2227.99) 2779.53,2227.99 ; P11.1@2769.26,2203.19 ccw(c2744.46,2227.99) 2779.53,2227.99 ; 2779.53,2227.99 ccw(c2814.6,2227.99) P11.1@2789.8,2203.19 ; 2779.53,2227.99 ccw(c2814.6,2227.99) P11.1@2789.8,2203.19 ; 2779.53,2227.99 ccw(c2814.6,2227.99) P11.1@2789.8,2203.19 ; 2779.53,2227.99 ccw(c2814.6,2227.99) P11.1@2789.8,2203.19 ; 2779.53,2227.99 ccw(c2814.6,2227.99) P11.1@2789.8,2203.19 ; 2779.53,2252.13 ccw(c2838.74,2252.13) P11.1@2796.87,2210.26 ; 2779.53,2252.13 ccw(c2838.74,2252.13) P11.1@2796.87,2210.26 ; 2779.53,2252.13 ccw(c2838.74,2252.13) P11.1@2796.87,2210.26 ; 2779.53,2252.13 ccw(c2838.74,2252.13) P11.1@2796.87,2210.26 ; 2779.53,2252.13 ccw(c2838.74,2252.13) P11.1@2796.87,2210.26 ; 2779.53,2283.42 cw(c2787.45,2283.42) U3.5@2781.85,2289.02 ; 2779.53,2283.42 cw(c2787.45,2283.42) U3.5@2781.85,2289.02 ; 2779.53,2283.42 cw(c2787.45,2283.42) U3.5@2781.85,2289.02 ; 2779.53,2283.42 cw(c2787.45,2283.42) U3.5@2781.85,2289.02 ; 2779.53,2283.42 cw(c2787.45,2283.42) U3.5@2781.85,2289.02
UART_TX: P11.2 U1.21 U3.1 | length 2943.5
  Top Layer w10: U1.21@2409.45,1949.21 2635.83,1949.21 P11.2@2879.53,2192.91 ; 2837.66,2151.04 cw(c2879.53,2109.17) P11.2@2879.53,2168.39 ; 2837.66,2151.04 ccw(c2795.79,2192.91) P11.2@2855,2192.91 ; 2837.66,2151.04 cw(c2879.53,2109.17) P11.2@2879.53,2168.39 ; 2837.66,2151.04 ccw(c2795.79,2192.91) P11.2@2855,2192.91 ; 2837.66,2151.04 cw(c2879.53,2109.17) P11.2@2879.53,2168.39 ; 2837.66,2151.04 ccw(c2795.79,2192.91) P11.2@2855,2192.91 ; 2837.66,2151.04 cw(c2879.53,2109.17) P11.2@2879.53,2168.39 ; 2837.66,2151.04 ccw(c2795.79,2192.91) P11.2@2855,2192.91 ; 2837.66,2151.04 cw(c2879.53,2109.17) P11.2@2879.53,2168.39 ; 2837.66,2151.04 ccw(c2795.79,2192.91) P11.2@2855,2192.91 ; 2849.01,2170.57 cw(c2886.14,2160.62) P11.2@2878.43,2198.28 ; 2849.01,2170.57 cw(c2886.14,2160.62) P11.2@2878.43,2198.28 ; 2849.01,2170.57 cw(c2886.14,2160.62) P11.2@2878.43,2198.28 ; 2849.01,2170.57 cw(c2886.14,2160.62) P11.2@2878.43,2198.28 ; 2849.01,2170.57 cw(c2886.14,2160.62) P11.2@2878.43,2198.28 ; 2849.01,2170.57 cw(c2886.14,2160.62) P11.2@2878.43,2198.28 ; 2849.01,2170.57 cw(c2886.14,2160.62) P11.2@2878.43,2198.28 ; 2849.01,2170.57 cw(c2886.14,2160.62) P11.2@2878.43,2198.28 ; 2849.01,2170.57 cw(c2886.14,2160.62) P11.2@2878.43,2198.28 ; 2849.01,2170.57 cw(c2886.14,2160.62) P11.2@2878.43,2198.28 ; 2854.73,2168.11 cw(c2879.53,2143.31) P11.2@2879.53,2178.39 ; 2854.73,2168.11 ccw(c2829.93,2192.91) P11.2@2865,2192.91 ; 2854.73,2168.11 cw(c2879.53,2143.31) P11.2@2879.53,2178.39 ; 2854.73,2168.11 ccw(c2829.93,2192.91) P11.2@2865,2192.91 ; 2854.73,2168.11 cw(c2879.53,2143.31) P11.2@2879.53,2178.39 ; 2854.73,2168.11 ccw(c2829.93,2192.91) P11.2@2865,2192.91 ; 2854.73,2168.11 cw(c2879.53,2143.31) P11.2@2879.53,2178.39 ; 2854.73,2168.11 ccw(c2829.93,2192.91) P11.2@2865,2192.91 ; 2854.73,2168.11 cw(c2879.53,2143.31) P11.2@2879.53,2178.39 ; 2854.73,2168.11 ccw(c2829.93,2192.91) P11.2@2865,2192.91 ; 2857.18,2162.4 ccw(c2847.23,2199.53) P11.2@2884.89,2191.82 ; 2857.18,2162.4 ccw(c2847.23,2199.53) P11.2@2884.89,2191.82 ; 2857.18,2162.4 ccw(c2847.23,2199.53) P11.2@2884.89,2191.82 ; 2857.18,2162.4 ccw(c2847.23,2199.53) P11.2@2884.89,2191.82 ; 2857.18,2162.4 ccw(c2847.23,2199.53) P11.2@2884.89,2191.82 ; 2857.18,2162.4 ccw(c2847.23,2199.53) P11.2@2884.89,2191.82 ; 2857.18,2162.4 ccw(c2847.23,2199.53) P11.2@2884.89,2191.82 ; 2857.18,2162.4 ccw(c2847.23,2199.53) P11.2@2884.89,2191.82 ; 2857.18,2162.4 ccw(c2847.23,2199.53) P11.2@2884.89,2191.82 ; 2857.18,2162.4 ccw(c2847.23,2199.53) P11.2@2884.89,2191.82
  Bottom Layer w10: P11.2@2879.53,2192.91 2882.87,2196.26 U3.1@2882.87,2324.8 ; P11.2@2862.18,2210.26 ccw(c2812.24,2260.21) 2882.87,2260.21 ; P11.2@2862.18,2210.26 ccw(c2812.24,2260.21) 2882.87,2260.21 ; P11.2@2862.18,2210.26 ccw(c2812.24,2260.21) 2882.87,2260.21 ; P11.2@2862.18,2210.26 ccw(c2812.24,2260.21) 2882.87,2260.21 ; P11.2@2862.18,2210.26 ccw(c2812.24,2260.21) 2882.87,2260.21 ; P11.2@2869.26,2203.19 ccw(c2836.38,2236.06) 2882.87,2236.06 ; P11.2@2869.26,2203.19 ccw(c2836.38,2236.06) 2882.87,2236.06 ; P11.2@2869.26,2203.19 ccw(c2836.38,2236.06) 2882.87,2236.06 ; P11.2@2869.26,2203.19 ccw(c2836.38,2236.06) 2882.87,2236.06 ; P11.2@2869.26,2203.19 ccw(c2836.38,2236.06) 2882.87,2236.06 ; 2882.87,2244.05 ccw(c2930.66,2244.05) P11.2@2896.87,2210.26 ; 2882.87,2244.05 ccw(c2930.66,2244.05) P11.2@2896.87,2210.26 ; 2882.87,2244.05 ccw(c2930.66,2244.05) P11.2@2896.87,2210.26 ; 2882.87,2244.05 ccw(c2930.66,2244.05) P11.2@2896.87,2210.26 ; 2882.87,2244.05 ccw(c2930.66,2244.05) P11.2@2896.87,2210.26
VAMS: U4.13 | length 527.2
  Top Layer w10: 877.82,1341.82 U4.13@877.82,1869.06
VAN: C24.2 R21.1 U4.15 | length 67.4
  Top Layer w10: U4.15@917.19,1869.06 917.19,1802.81 918,1802